# Altium PCB PCB_v01.PcbDoc
Units mm, origin at the board's own origin, x right, y up, seen from the top; angles counter-clockwise.
Board outline 100.71 x 75.2 mm, 2 copper layers (Top Layer, Bottom Layer); 131 components, 78 nets, 366 pads, 171 vias.
Unrouted connection lines stored in the file: 141.
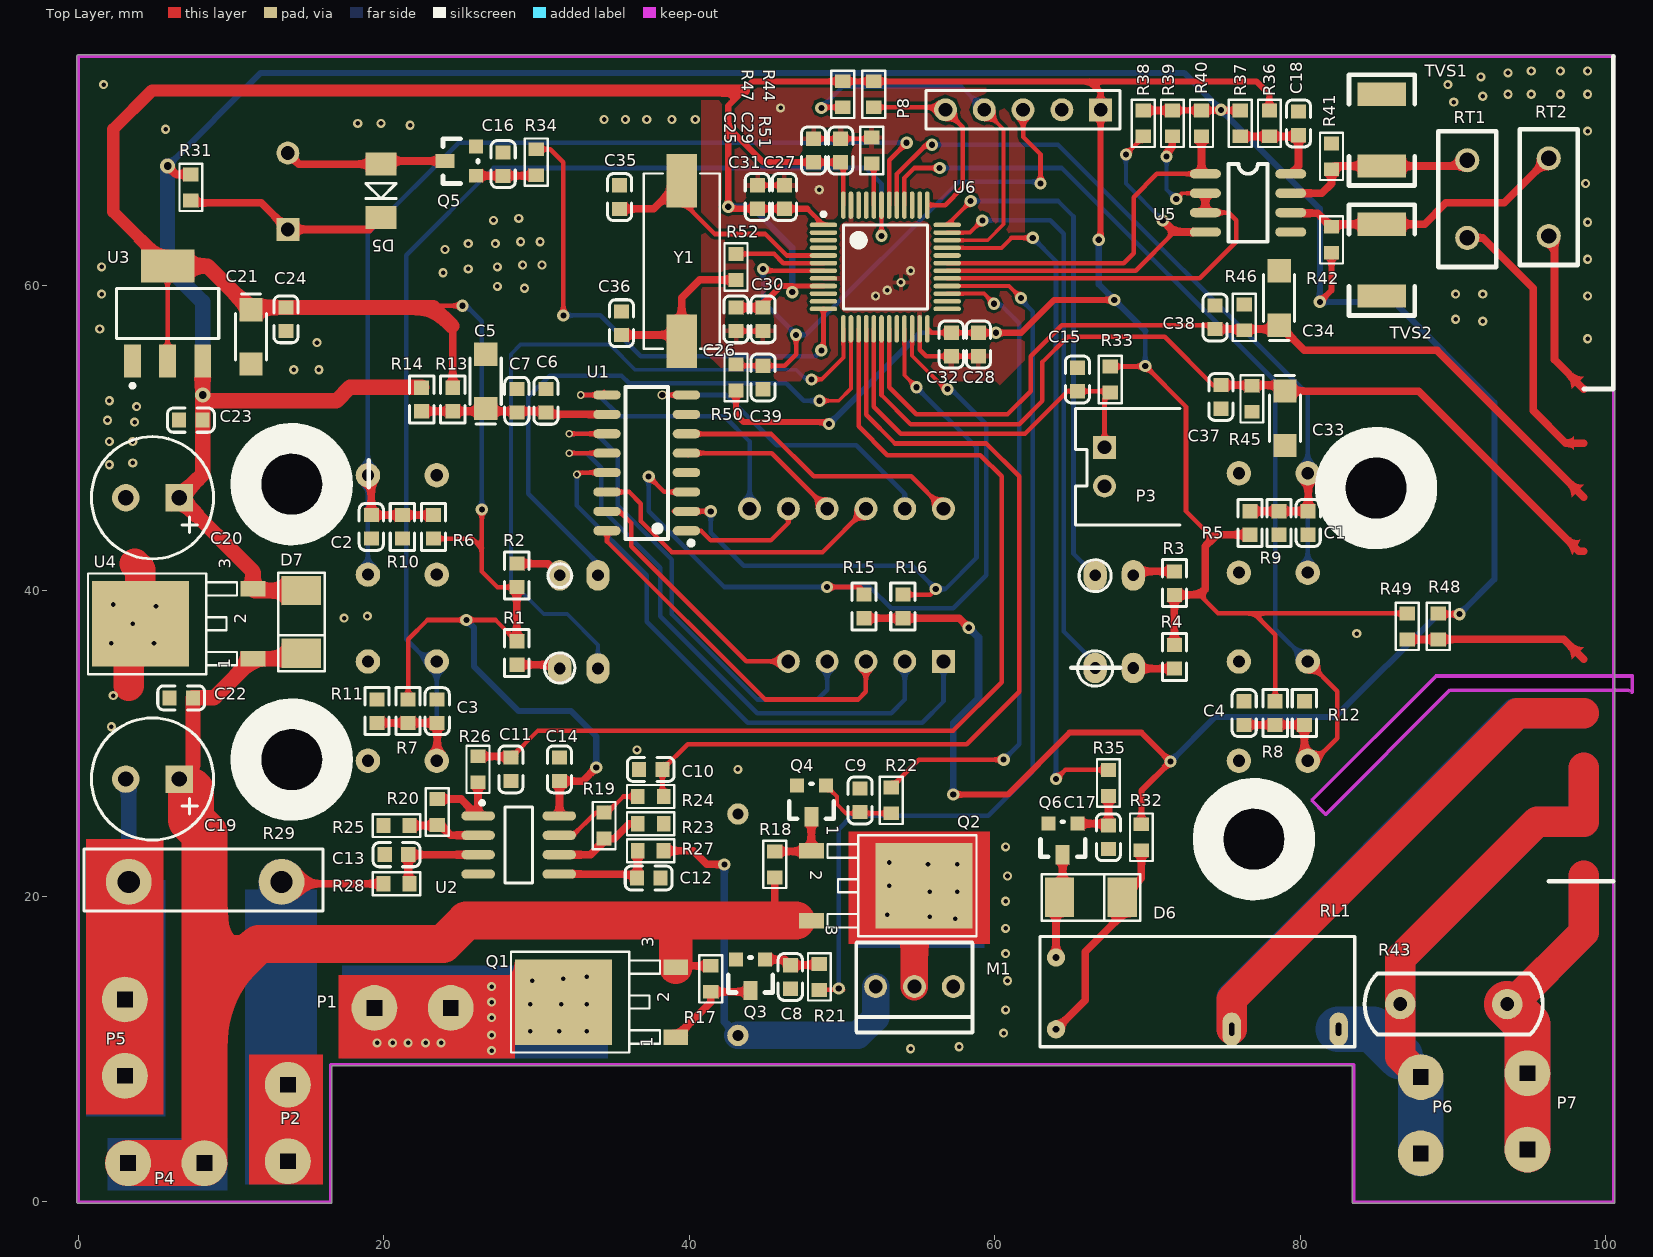
[diagram p0: Top Layer view]
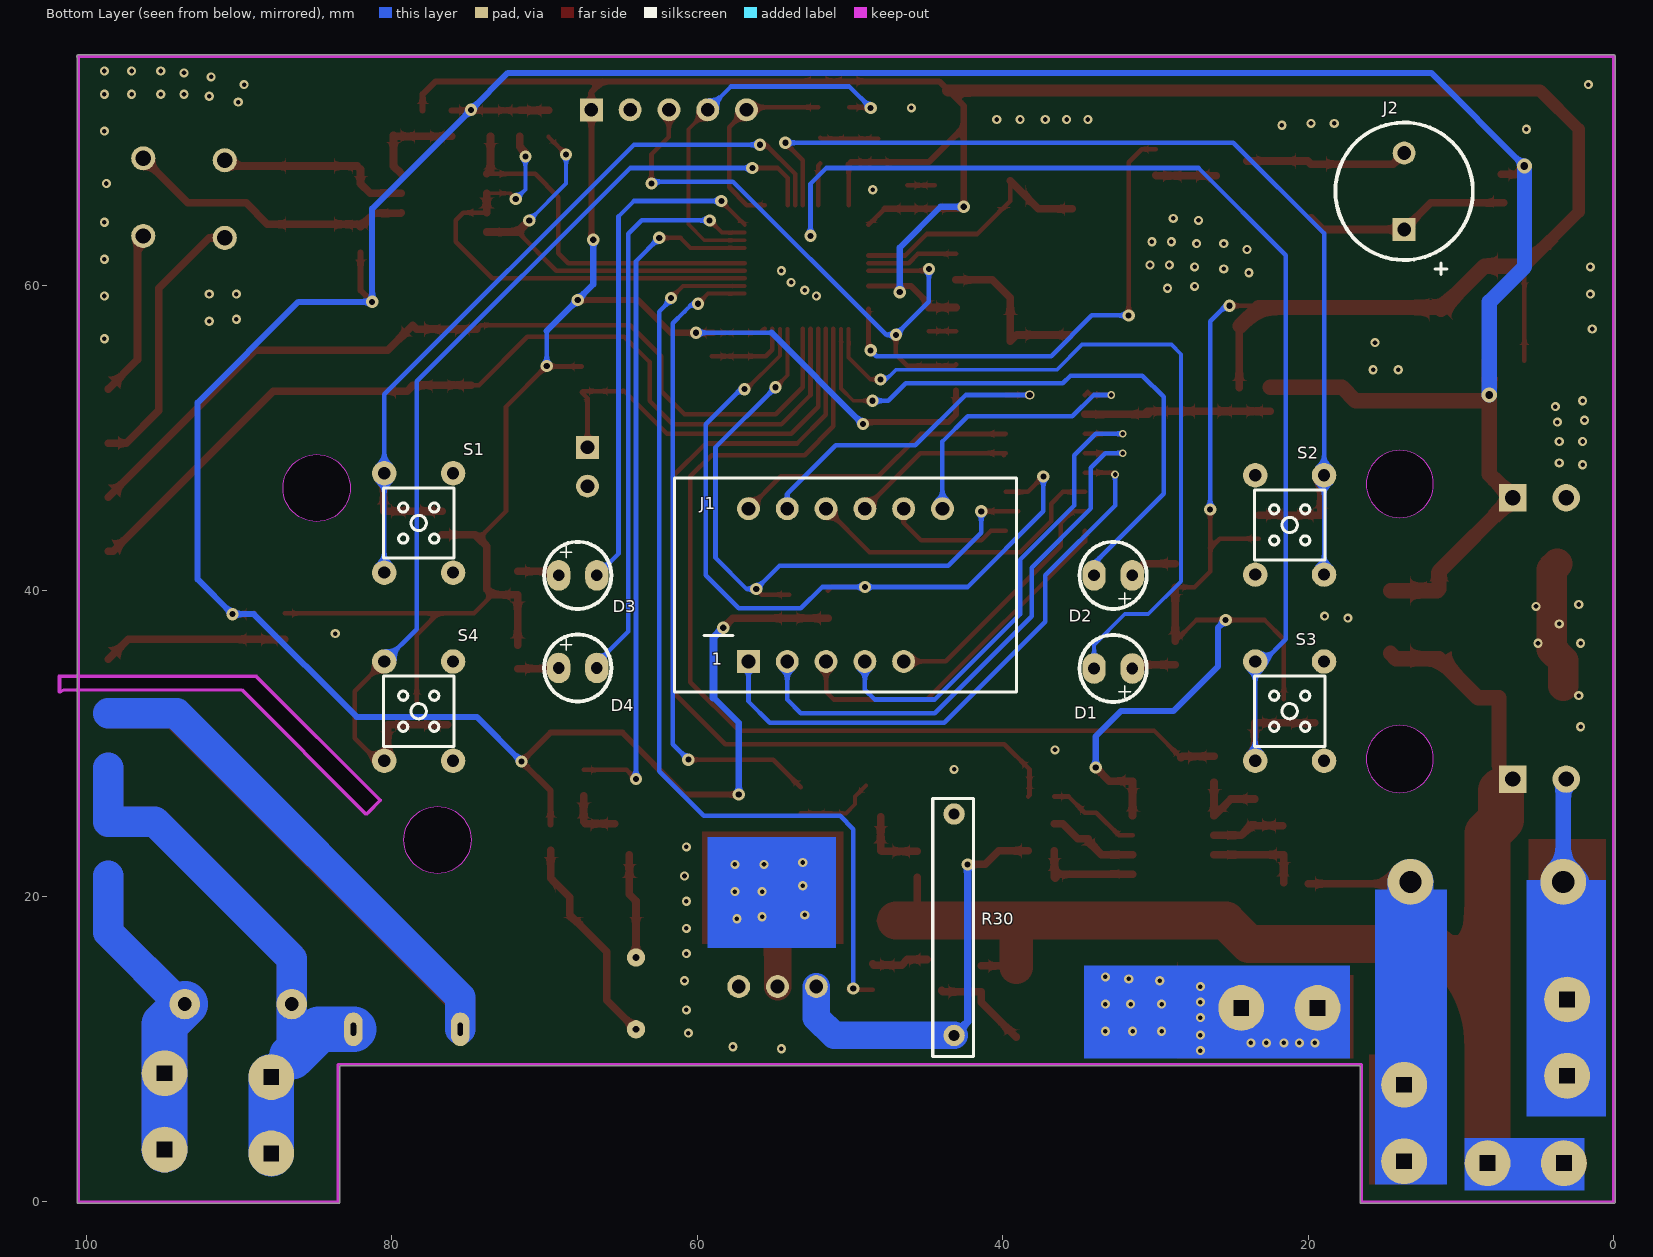
[diagram p1: Bottom Layer view, seen from below]

## Layer stack, top to bottom
Top Solder: solder mask 0.0102, Solder Resist, Dk 3.5
Top Layer: signal copper 0.0356
Dielectric 1: dielectric 0.32, FR-4, Dk 4.8
Bottom Layer: signal copper 0.0356
Bottom Solder: solder mask 0.0102, Solder Resist, Dk 3.5

## Board outline
-0.1,0 ccw(c0,0) 0,-0.1 16.5,-0.1 ccw(c16.5,0) 16.6,0 16.6,8.9 83.4,8.9 83.4,0.061 ccw(c83.5,0.061) 83.404,0.031 ccw(c83.5,0) 83.5,-0.1 100.5,-0.1 ccw(c100.5,0) 100.6,0 100.6,74.949 ccw(c100.514,75) 100.614,75 ccw(c100.514,75) 100.514,75.1 0,75.1 ccw(c0,75) -0.1,75
cut-out: 81.463,25.456 ccw(c81.534,25.527) 81.566,25.432 ccw(c81.661,25.4) 81.732,25.329 89.831,33.428 101.449,33.428 101.682,33.311 ccw(c101.727,33.401) 101.827,33.401 101.827,34.417 ccw(c101.727,34.417) 101.727,34.517 88.9,34.517 ccw(c88.9,34.417) 88.829,34.488 80.701,26.36 ccw(c80.772,26.289) 80.701,26.218
cut-out: 74.8,23.7 ccw(c77,23.7) 77,21.5 ccw(c77,23.7) 79.2,23.7 ccw(c77,23.7) 77,25.9 ccw(c77,23.7)
cut-out: 82.713,46.735 ccw(c84.913,46.735) 84.913,44.535 ccw(c84.913,46.735) 87.113,46.735 ccw(c84.913,46.735) 84.913,48.935 ccw(c84.913,46.735)
cut-out: 14,26.8 cw(c14,29) 11.8,29 cw(c14,29) 14,31.2 cw(c14,29) 16.2,29 cw(c14,29)
cut-out: 14,44.8 cw(c14,47) 11.8,47 cw(c14,47) 14,49.2 cw(c14,47) 16.2,47 cw(c14,47)

## Design rules (kind name [scope] priority, off if disabled: settings)
Clearance [All] p1: gap=0.2
PolygonConnect PolygonConnect_1 [IsVia] p1: connectstyle=Direct reliefconductorwidth=0.3 reliefentries=4 polygonreliefangle="90 Angle" airgapwidth=0.254
PolygonConnect [All] p2: connectstyle=Relief reliefconductorwidth=0.3 reliefentries=4 polygonreliefangle="90 Angle" airgapwidth=0.254
RoutingVias [All] p1: holewidth=0.4 width=0.9 viastyle="Through Hole" minholewidth=0.305 minwidth=0.305 maxholewidth=0.711 maxwidth=1.27
SolderMaskExpansion [All] p1: expansion=0.102
UnRoutedNet UnRoutedNet_1 [All] p1:
UnRoutedNet [All] p2:
Width [All] p1: maxlimit=5 minlimit=0.2 preferedwidth=0.254
29 further rules are at their usual default settings.

## Classes and differential pairs
component class CPU: C18 C19 C20 C21 C22 C23 C24 C25 C26 C27 C28 C29 C30 C31 C32 C33 C34 C35 C36 C37 C38 C39 D7 P4 P5 P6 P7 P8 R36 R37 R38 R39 R40 R41 R42 R43 R44 R45 R46 R47 R48 R49 R50 R51 R52 RT1 RT2 TVS1 TVS2 U3 U4 U5 U6 Y1
component class HMI: C1 C2 C3 C4 C5 C6 C7 D1 D2 D3 D4 J1 R1 R2 R3 R4 R5 R6 R7 R8 R9 R10 R11 R12 R13 R14 R15 R16 S1 S2 S3 S4 U1
component class Main: C8 C9 C10 C11 C12 C13 C14 C15 C16 C17 D5 D6 J2 M1 P1 P2 P3 Q1 Q2 Q3 Q4 Q5 Q6 R17 R18 R19 R20 R21 R22 R23 R24 R25 R26 R27 R28 R29 R30 R31 R32 R33 R34 R35 RL1 U2

## Components (designator, comment, footprint, x,y, rotation, side; value= is the part's Value field where it differs from the comment)
C1 "100nF (104) 10% 50V" 0603_C 80.518,44.45 r90 top
C2 "100nF (104) 10% 50V" 0603_C 19.177,44.196 r90 top
C3 "100nF (104) 10% 50V" 0603_C 23.495,32.131 r270 top
C4 "100nF (104) 10% 50V" 0603_C 76.327,32.004 r270 top
C5 "Cap Pol" CAP-1206 26.67,53.721 r90 top
C6 "1uF (105) 10% 50V" 0603_C 30.607,52.451 r270 top
C7 "100nF (104) 10% 50V" 0603_C 28.702,52.451 r270 top
C8 "100nF (104) 10% 50V" 0603_C 46.609,14.732 r90 top
C9 "100nF (104) 10% 50V" 0603_C 51.181,26.289 r270 top
C10 "100nF (104) 10% 50V" 0603_C 37.473,28.321 r0 top
C11 "100nF (104) 10% 50V" 0603_C 28.321,28.321 r90 top
C12 "100nF (104) 10% 50V" 0603_C 37.338,21.209 r180 top
C13 "100nF (104) 10% 50V" 0603_C 20.828,22.733 r0 top
C14 "100nF (104) 10% 50V" 0603_C 31.496,28.321 r270 top
C15 "100nF (104) 10% 50V" 0603_C 65.405,53.848 r270 top
C16 "100nF (104) 10% 50V" 0603_C 27.813,67.945 r270 top
C17 "100nF (104) 10% 50V" 0603_C 67.437,23.876 r90 top
C18 "100nF (104) 10% 50V" 0603_C 79.883,70.612 r90 top
C19 "Cap Pol" C-RB-8 6.604,27.686 r180 top
C20 "Cap Pol" C-RB-8 6.604,46.101 r180 top
C21 "Cap Pol" CAP-1206 11.303,56.642 r270 top
C22 "100nF (104) 10% 50V" 0603_C 6.731,33 r0 top
C23 "100nF (104) 10% 50V" 0603_C 7.366,51.181 r0 top
C24 "100nF (104) 10% 50V" 0603_C 13.589,57.785 r90 top
C25 "1uF (105) 10% 50V" 0603_C 48.133,68.842 r270 top
C26 "1uF (105) 10% 50V" 0603_C 43.053,57.785 r90 top
C27 "1uF (105) 10% 50V" 0603_C 46.228,65.794 r270 top
C28 "1uF (105) 10% 50V" 0603_C 58.928,56.134 r90 top
C29 "100nF (104) 10% 50V" 0603_C 49.911,68.842 r270 top
C30 "100nF (104) 10% 50V" 0603_C 44.831,57.785 r90 top
C31 "100nF (104) 10% 50V" 0603_C 44.45,65.794 r270 top
C32 "100nF (104) 10% 50V" 0603_C 57.15,56.134 r90 top
C33 "Cap Pol" CAP-1206 78.994,51.308 r270 top
C34 "Cap Pol" CAP-1206 78.613,59.182 r90 top
C35 "22pF (220) 5% 50V" 0603_C 35.433,65.786 r90 top
C36 "22pF (220) 5% 50V" 0603_C 35.56,57.531 r90 top
C37 "100nF (104) 10% 50V" 0603_C 74.803,52.705 r90 top
C38 "100nF (104) 10% 50V" 0603_C 74.422,57.912 r270 top
C39 "100nF (104) 10% 50V" 0603_C 44.831,53.975 r90 top
D1 "LED" LED(С) 32.766,34.925 r0 bottom locked
D2 "LED" LED(С) 32.766,41.021 r0 bottom locked
D3 "LED" LED(С) 67.818,41.021 r180 bottom locked
D4 "LED" LED(С) 67.818,34.96 r180 bottom locked
D5 "Diode" DIODE-1206 19.812,67.945 r270 top
D6 "M7" DO214AC-SMA 66.294,19.939 r0 top
D7 "M7" DO214AC-SMA 14.605,37.973 r270 top
J1 "DPY-3CK" DYP-3BIT_2.8 50.292,40.386 r180 bottom locked
J2 "BEEP" BEEP0905 13.716,66.167 r90 bottom
M1 "风机" CONNECTOR3X2.5 54.737,14.097 r270 top
P1 "Cold+" CONSLICE0.5 24.384,12.7 r180 top
P2 "Cold-" CONSLICE0.5 13.716,2.667 r90 top
P3 "NTC" HDR1X2_2 67.183,48.133 r270 top
P4 "+12V" CONSLICE0.5 8.255,2.54 r180 top
P5 "" CONSLICE0.5 3.048,8.255 r90 top
P6 "L" CONSLICE0.5 87.884,3.175 r90 top
P7 "N" CONSLICE0.5 94.869,3.429 r90 top
P8 "Header 5" HDR1X5 66.929,71.501 r180 top
Q1 "IRFR5305" DPAK 35.433,13.081 r90 top
Q2 "IRFR5305" DPAK 51.689,20.701 r270 top
Q3 "SS8050" SOT-23 44.958,15.875 r180 top
Q4 "SS8050" SOT-23 48.952,27.254 r180 top
Q5 "SS8050" SOT-23 26.035,67.183 r90 top
Q6 "SS8050" SOT-23 65.405,24.765 r180 top
R1 "2k" 0603_R 28.702,35.941 r270 top
R2 "2k" 0603_R 28.702,41.021 r90 top
R3 "2k" 0603_R 71.755,40.513 r90 top
R4 "2k" 0603_R 71.755,35.687 r270 top
R5 "10K" 0603_R 76.708,44.45 r270 top
R6 "10K" 0603_R 23.241,44.196 r270 top
R7 "10K" 0603_R 21.59,32.131 r90 top
R8 "10K" 0603_R 78.359,32.004 r90 top
R9 "220R" 0603_R 78.613,44.45 r90 top
R10 "220R" 0603_R 21.209,44.196 r90 top
R11 "220R" 0603_R 19.558,32.131 r270 top
R12 "220R" 0603_R 80.264,32.004 r270 top
R13 "0R" 0603_R 24.511,52.539 r90 top
R14 "0R" 0603_R 22.479,52.539 r90 top
R15 "10K" 0603_R 51.435,38.989 r270 top
R16 "10K" 0603_R 53.975,38.989 r270 top
R17 "4.7K" RESC1608N-R0603 41.402,14.605 r270 top
R18 "4.7K" RESC1608N-R0603 45.593,22.098 r90 top
R19 "30K" RESC1608N-R0603 34.417,24.638 r270 top
R20 "100K" RESC1608N-R0603 23.495,25.527 r270 top
R21 "1K" RESC1608N-R0603 48.514,14.732 r270 top
R22 "1K" RESC1608N-R0603 53.213,26.289 r90 top
R23 "2k" RESC1608N-R0603 37.473,24.765 r0 top
R24 "10K" RESC1608N-R0603 37.473,26.543 r180 top
R25 "2k" RESC1608N-R0603 20.828,24.638 r180 top
R26 "10K" RESC1608N-R0603 26.162,28.321 r270 top
R27 "2k" RESC1608N-R0603 37.465,22.987 r0 top
R28 "2k" RESC1608N-R0603 20.828,20.828 r180 top
R29 "30mR" RSENSE10MM 3.302,20.955 r0 top
R30 "2.2R" R0.4X14.5 43.18,25.4 r270 bottom
R31 "3.3R" RESC1608N-R0603 7.366,66.421 r270 top
R32 "3.3R" RESC1608N-R0603 69.596,23.876 r270 top
R33 "100K" RESC1608N-R0603 67.564,53.848 r270 top
R34 "1K" RESC1608N-R0603 29.972,68.072 r90 top
R35 "1K" RESC1608N-R0603 67.437,27.432 r90 top
R36 "0R" RESC1608N-R0603 77.978,70.612 r90 top
R37 "0R" RESC1608N-R0603 76.073,70.612 r90 top
R38 "4.7K" RESC1608N-R0603 69.723,70.612 r270 top
R39 "4.7K" RESC1608N-R0603 71.628,70.612 r270 top
R40 "4.7K" RESC1608N-R0603 73.533,70.612 r270 top
R41 "10k" RESC1608N-R0603 82.042,68.453 r270 top
R42 "10k" RESC1608N-R0603 82.042,62.992 r270 top
R43 "10D471" 10D471K 90.043,12.954 r180 top
R44 "10k" RESC1608N-R0603 52.07,72.517 r270 top
R45 "100K" RESC1608N-R0603 76.835,52.578 r270 top
R46 "100K" RESC1608N-R0603 76.327,57.912 r90 top
R47 "10k" RESC1608N-R0603 50.038,72.517 r270 top
R48 "0R" RESC1608N-R0603 89.027,37.68 r90 top
R49 "0R" RESC1608N-R0603 86.995,37.68 r90 top
R50 "10k" RESC1608N-R0603 43.053,53.975 r90 top
R51 "100k" RESC1608N-R0603 51.943,68.834 r90 top
R52 "1M" RESC1608N-R0603 43.053,61.214 r270 top
RL1 "TXS2-24V" ALDP112 64.008,11.303 r0 top
RT1 "BK250-080" RAD0.2 90.932,63.119 r90 top
RT2 "BK250-080" RAD0.2 96.266,63.246 r90 top
S1 "SET/ESC" SWITCH_4_6*6 78.232,44.45 r270 bottom locked
S2 "Auto/Man" SWITCH_4_6*6 21.209,44.323 r90 bottom locked
S3 "Up" SWITCH_4_6*6 21.209,32.131 r270 bottom locked
S4 "Down" SWITCH_4_6*6 78.232,32.131 r270 bottom locked
TVS1 "SMBJ6.5CA" 1812 85.344,72.517 r270 top
TVS2 "SMBJ6.5CA" 1812 85.344,64.008 r270 top
U1 "TM1650" SOIC-16_150MIL 37.211,48.387 r90 top
U2 "LM358" NSO8_N 28.829,23.368 r0 top
U3 "SPX1117-M3-3.3" SOT223 5.842,58.166 r0 top
U4 "LM78M05" DPAK 7.747,37.846 r90 top
U5 "SN65HVD3082" SO-8 73.787,67.31 r0 top
U6 "STM32F030C8T6" STM-LQFP48_N 52.832,61.214 r0 top
Y1 "8MHz" XTAL-HC49S 39.497,61.595 r270 top

## Footprints (in the part's own frame and the unit in brackets; to place one, negate y for a bottom-side part, rotate by r counter-clockwise, add the part's x,y. Pads: shape width x height; smd on the part's side, far side on the other; paste and mask are expansions set on the pad)
10D471K [mm]
  round 2 hole 0.9: 1(-3.5,0) 2(3.5,0)
  silkscreen extent -5.83,-2 5.83,2
0603_C [mm]
  rect 0.93x0.98 smd: 1(-0.77,0) 2(0.77,0)
  silkscreen extent -1.53,-0.79 1.54,0.79, body extent -0.8,-0.4 0.8,0.4, height 0.3
0603_R [mm]
  rect 0.93x0.98 smd: 1(-0.77,0) 2(0.77,0)
  silkscreen extent -1.53,-0.79 1.54,0.79, body extent -0.85,-0.4 0.85,0.4, height 0.56
1812 [mil]
  rect 60x125 smd: 1(0,0) 2(185,0)
  silkscreen extent -50,-85 235,85
ALDP112 [mm]
  round 1.2 hole 0.45: 1(0,0) 2(0,4.7)
  rrect100% 1.2x2.2 hole 0.35 slot 0.85 at 90 deg: 3(11.5,0) 4(18.5,0)
  silkscreen extent -1.05,-1.14 19.56,6.08
BEEP0905 [mm] "蜂鸣器"
  rect 1.5x1.5 hole 0.9: 1(-2.5,0)
  round 1.5 hole 0.9: 2(2.5,0)
  silkscreen extent -5.46,-4.5 4.5,4.5
C-RB-8 [mm] "35V 220UF电容"
  rect 1.8x1.8 hole 1: 1(0,0)
  round 1.8 hole 1: 2(3.5,0)
  silkscreen extent -2.25,-4 5.75,4
CAP-1206 [mil] "贴片元件"
  rect 60x60 smd: 1(-70,0) 2(70,0)
  silkscreen extent -110,-40 60,40, body extent -65,-35 65,35, height 39
CONNECTOR3X2.5 [mm]
  round 1.5 hole 0.9: 1(0,-2.54) 2(0,0) 3(0,2.54)
  silkscreen extent -2.88,-3.81 3.01,3.81
CONSLICE0.5 [mm]
  round 3 hole 1 square: 1(0,0) 2(5,0)
DIODE-1206 [mm] "玻璃封装二极管"
  rect 1.5x2 smd: 1(0,0) 2(3.5,0)
  silkscreen extent 1.25,-1 2.25,1
DO214AC-SMA [mil]
  rect 75x102 smd: 1(-80.7,0) 2(80.7,0)
  silkscreen extent -127,-60 127,60, body extent -104,-55 104,55, height 98
DPAK [mil]
  rect 40x64 smd: 1(-90,-145) 3(90,-145)
  rect 220x250 smd: 2(0,145)
  silkscreen extent -130,-104 130,280, body extent -130,-151 130,247, height 95
DYP-3BIT_2.8 [mm] "数码管"
  rect 1.5x1.5 hole 0.9: 1(-6.35,-5)
  round 1.5 hole 0.9: 2(-3.81,-5) 3(-1.27,-5) 4(1.27,-5) 5(3.81,-5) 7(6.35,5) 8(3.81,5) 9(1.27,5) 10(-1.27,5) 11(-3.81,5) 12(-6.35,5)
  silkscreen extent -11.2,-7 11.2,7
HDR1X2_2 [mm] "Connector; Header; 2 Position"
  rect 1.5x1.5 hole 0.9: 1(-1.27,0)
  round 1.5 hole 0.9: 2(1.27,0)
  silkscreen extent -3.81,-1.91 3.81,4.95
HDR1X5 [mm] "Connector; Header; 5 Position"
  rect 1.5x1.5 hole 0.9: 1(0,0)
  round 1.5 hole 0.9: 2(2.54,0) 3(5.08,0) 4(7.62,0) 5(10.16,0)
  silkscreen extent -1.27,-1.27 11.43,1.27
LED(С) [mm]
  oval 1.524x2 hole 0.762: 1(-1.25,0) 2(1.25,0)
  silkscreen extent -2.2,-2.2 2.2,2.2
NSO8_N [mm] "SOIC-max660"
  oval 2.2x0.6 smd: 1(-2.654,1.905) 2(-2.654,0.635) 3(-2.654,-0.635) 4(-2.654,-1.905) 5(2.654,-1.905) 6(2.654,-0.635) 7(2.654,0.635) 8(2.654,1.905)
  silkscreen extent -2.52,-2.5 0.9,2.88, body extent -1.95,-2.45 1.95,2.45, height 1.75
R0.4X14.5 [mm]
  round 1.4 hole 0.7: 1(0,0) 2(14.5,0)
  silkscreen extent -1.02,-1.4 15.88,1.27
RAD0.2 [mil]
  round 62 hole 39.37: 1(0,0) 2(200,0)
  silkscreen extent -75,-75 275,75
RESC1608N-R0603 [mm]
  rect 0.9x1 smd mask+0.102: 1(-0.85,0) 2(0.85,0)
  silkscreen extent -1.55,-0.75 1.55,0.75, body extent -0.85,-0.48 0.85,0.48, height 0.6
RSENSE10MM [mm]
  round 3 hole 1.45: 1(0,0) 2(10,0)
  silkscreen extent -2.92,-1.91 12.7,2.16
SO-8 [mil]
  oval 80x24 smd: 1(0,0) 2(0,-50) 3(0,-100) 4(0,-150) 5(220,-150) 6(220,-100) 7(220,-50) 8(220,0)
  silkscreen extent 60,-175 160,25
SOIC-16_150MIL [mm]
  oval 0.6x1.8 smd: 1(-4.445,-2.6) 2(-3.175,-2.6) 3(-1.905,-2.6) 4(-0.635,-2.6) 5(0.635,-2.6) 6(1.905,-2.6) 7(3.175,-2.6) 8(4.445,-2.6) 9(4.445,2.6) 10(3.175,2.6) 11(1.905,2.6) 12(0.635,2.6) 13(-0.635,2.6) 14(-1.905,2.6) 15(-3.175,2.6) 16(-4.445,2.6)
  silkscreen extent -5.4,-3.05 4.97,1.4
SOT223 [mm]
  rect 1.1x2.15 smd: 1(-2.3,-3.1) 2(0,-3.1) 3(2.3,-3.1)
  rect 3.5x2.15 smd: 2(0,3.1)
  silkscreen extent -3.35,-4.85 3.35,1.63
SOT-23 [mil]
  rect 36x36 smd: 1(0,0) 2(75,0)
  rect 36x50 smd: 3(38,80)
  silkscreen extent -20,-5 95,85
STM-LQFP48_N [mm] "QFP, 48-Leads, Body 7x7mm, Pitch 0.5mm, IPC Medium Density"
  oval 1.8x0.3 smd: 1(-4.05,2.75) 2(-4.05,2.25) 3(-4.05,1.75) 4(-4.05,1.25) 5(-4.05,0.75) 6(-4.05,0.25) 7(-4.05,-0.25) 8(-4.05,-0.75) 9(-4.05,-1.25) 10(-4.05,-1.75) 11(-4.05,-2.25) 12(-4.05,-2.75) 25(4.05,-2.75) 26(4.05,-2.25) 27(4.05,-1.75) 28(4.05,-1.25) 29(4.05,-0.75) 30(4.05,-0.25) 31(4.05,0.25) 32(4.05,0.75) 33(4.05,1.25) 34(4.05,1.75) 35(4.05,2.25) 36(4.05,2.75)
  oval 0.3x1.8 smd: 13(-2.75,-4.05) 14(-2.25,-4.05) 15(-1.75,-4.05) 16(-1.25,-4.05) 17(-0.75,-4.05) 18(-0.25,-4.05) 19(0.25,-4.05) 20(0.75,-4.05) 21(1.25,-4.05) 22(1.75,-4.05) 23(2.25,-4.05) 24(2.75,-4.05) 37(2.75,4.05) 38(2.25,4.05) 39(1.75,4.05) 40(1.25,4.05) 41(0.75,4.05) 42(0.25,4.05) 43(-0.25,4.05) 44(-0.75,4.05) 45(-1.25,4.05) 46(-1.75,4.05) 47(-2.25,4.05) 48(-2.75,4.05)
  silkscreen extent -4.17,-2.75 2.75,3.57, body extent -3.5,-3.5 3.5,3.5, height 1.6
SWITCH_4_6*6 [mm]
  round 1.6 hole 0.8: 1(-3.25,2.25) 1(3.25,2.25) 2(-3.25,-2.25) 2(3.25,-2.25)
  silkscreen extent -2.3,-2.3 2.3,2.3, body extent -3.99,-3 3.99,3, height 4.9
XTAL-HC49S [mil]
  rect 138x79 smd: 1(-207,0) 2(207,0)
  silkscreen extent -226,-98 226,98, body extent -254,-98 254,98, height 158

## Part data
C1 C2 C3 C4 C7 C8 C9 C10 C11 C12 C13 C14 C15 C16 C17 C18 C22 C23 C24 C29 C30 C31 C32 C37 C38 C39: library part "0603 100nF (104) 10% 50V", "贴片电容"
C5 C19 C20 C21 C33 C34: "极性电解电容"
C6 C25 C26 C27 C28: library part "0603 1uF (105) 10% 50V", "贴片电容"
C35 C36: library part "0603 22pF (220) 5% 50V", "贴片电容"
D1 D2 D3 D4: library part LED0, "Typical INFRARED GaAs LED"
D5: "二极管"
D6 D7: library part Diode, "二极管"
J1: library part DPY-3CK_1, "共阴3位数码管"
J2: "蜂鸣器"
M1: "MALE CONN. 3 POLES P=7.62mm"
P1 P2 P3 P4 P5 P6 P7: library part "Header 2", "Header, 2-Pin"
P8: "Header, 5-Pin"
Q1 Q2: "P-CH MOSFET LOGIC LEVEL 12A 60V SMD"
Q3 Q4 Q5 Q6: "NPN贴片三极管"
R1 R2 R3 R4 R23 R25 R27 R28: library part RES1, "2k/±10%"
R5 R6 R7 R8 R13 R14 R15 R16 R24 R26 R36 R37 R48 R49: library part RES1, "10K/±10%"
R9 R10 R11 R12: library part RES1, "220R/±10%"
R17 R18 R38 R39 R40: library part RES1, "4.7K/±10%"
R19: library part RES1, "30K/±1%"
R20 R33 R45 R46: library part RES1, "100K/±10%"
R21 R22 R34 R35: library part RES1, "1K/±10%"
R29 R30: library part Res1, "Resistor"
R31 R32: library part RES1, "3.3R/±10%"
R41 R42 R44 R47 R50: library part RES1, "10k/±10%"
R43: library part "Res Varistor", "Varistor (Voltage-Sensitive Resistor)"
R51: library part RES1, "100k±10%"
R52: library part RES1, "1M/±10%"
RL1: "MONOSTABLE RELAY 2POLES 110V 1A COIL24V"
RT1 RT2: library part PTC-Thermistor, "热敏电阻"
S1 S2 S3 S4: library part SW-PB, "6*6*5四脚直插轻触开关"
TVS1 TVS2: library part TVS管-贴片, "TVS"
U2: "双运放"
U3: library part "IC-SPX1117M3-L-3.3 工业级 SOT-223 SIPEX", "IC"
U4: library part LDO-78XX_1, "LDO"
U5: library part RS485
U6: "ARM Cortex-M0 32-bit MCU, 64 KB Flash, 8 KB Internal RAM, 39 I/Os, 48-pin LQFP, -40 to 85 degC, Tray"
Y1: library part RU5608001, "QUARTZ 8MHz SMD"

## Via types
v1: diameter 0.6, hole 0.3, Top Layer to Bottom Layer, 116 vias
v2: diameter 0.8, hole 0.4, Top Layer to Bottom Layer, 48 vias
v3: diameter 0.508, hole 0.305, Top Layer to Bottom Layer, 4 vias
v4: diameter 1, hole 0.5, Top Layer to Bottom Layer, 2 vias
v5: diameter 0.6, hole 0.4, Top Layer to Bottom Layer, 1 vias

## Nets (pads, with @x,y where several pads share a name; then routed paths per layer and width w, separated by ;. In a path a pad name is that pad's centre, name@x,y a point inside that pad or via, vN(x,y) a via of type N, cw(c..) or ccw(c..) an arc to the next point about the centre after c; other vN are vias at no path point)
3.3V: C14.2 C21.1 C24.2 C25.2 C26.2 C27.2 C28.2 C29.2 C30.2 C31.2 C32.2 P8.1 R1.1 R2.1 R3.1 R4.1 R5.2 R6.2 R7.2 R8.2 R13.2 R33.1 R36.2 R44.1 R47.1 R49.2 R50.1 U2.8 U3.2 U6.1 U6.9 U6.24 U6.48 | length 324.8
  Top Layer w0.3: U3.2@5.842,55.066 U3.2@5.842,61.266 ; R7.2 21.59,36.83 22.86,38.1 v2(25.4,38.1) 27.313,38.1 R1.1 ; 23.233,58.555 23.352,58.674 v2(25.146,58.674) ; R6.2 25.789,43.426 26.416,42.799 ; v2(26.416,45.339) 26.416,42.799 ; R2.1 27.44,40.251 26.416,41.275 26.416,42.799 ; C30.2 C30.2@44.831,58.801 ; 46.736,59.964 U6.9 ; 47.722,65.024 U6.1 ; U6.48 C29.2@50.082,67.901 ; U6.24 55.842,56.904 C32.2 C28.2 ; R33.1 69.811,54.698 v2(69.85,54.737) 72.517,52.07 72.517,45.212 74.295,43.434 ; 73.398,39.743 74.611,38.53 76.962,38.53 ; R8.2 78.359,37.133 76.962,38.53 ; R49.2 76.962,38.53
  Top Layer w0.4: R50.1 43.053,51.562 43.561,51.054 49.022,51.054 v2(49.149,50.927) ; C30.2@44.831,58.801 45.994,59.964 46.736,59.964 v2(46.736,59.563) ; 47.722,65.024 C27.2 C31.2 42.672,65.024 v2(42.545,65.151) 42.545,70.358 ; C29.2@50.082,67.901 C29.2 C25.2 44.831,68.072 42.545,70.358 ; C28.2 v2(60.079,56.904) 61.73,56.904 63.881,59.055 v2(67.818,59.055) ; v2(66.802,62.992) 66.929,63.119 P8.1 66.929,72.644 66.206,73.367 ; R36.2 77.978,72.517 77.128,73.367 66.206,73.367 ; 42.545,70.358 42.545,71.755 43.561,72.771 44.157,73.367 R47.1 R44.1 66.206,73.367
  Top Layer w0.5: 24.447,57.34 24.511,57.277 R13.2 ; R1.1 R2.1 ; U2.8 31.496,25.286 C14.2 33.012,27.551 v2(33.909,28.448) ; C26.2 C30.2 ; R4.1 R3.1 73.398,39.743 73.787,40.132 73.787,42.926 74.295,43.434 74.541,43.68 R5.2
  Top Layer w0.8: U3.2@5.842,61.266 2.286,64.822 2.286,70.231 4.826,72.771 43.561,72.771
  Top Layer w1: U3.2@5.842,61.266 8.457,61.266 C21.1 11.438,58.555 C24.2 23.233,58.555 24.447,57.34
  Bottom Layer w0.3: v2(25.146,58.674) 25.4,58.674 26.416,57.658 v2(26.416,45.339) ; 55.126,56.904 v2(60.079,56.904) ; v2(69.85,54.737) 69.85,57.023
  Bottom Layer w0.4: v2(25.4,38.1) 25.908,37.592 25.908,35.052 28.829,32.131 32.258,32.131 33.909,30.48 v2(33.909,28.448) ; v2(42.545,65.151) 44.069,65.151 46.736,62.484 v2(46.736,59.563) ; v2(49.149,50.927) 55.126,56.904 ; v2(66.802,62.992) 66.802,60.071 v2(67.818,59.055) 69.85,57.023
5V: C20.1 C23.2 D7.1 R14.2 R15.2 R16.2 R31.1 R32.1 R37.2 R38.1 R39.1 R40.1 R42.2 R48.2 U3.3 U4.3 | length 244.7
  Top Layer w0.4: v2(57.277,26.67) 60.833,26.67 64.897,30.734 69.596,30.734 v2(71.501,28.829) 69.596,26.924 R32.1 ; R39.1 R40.1 R37.2 ; v2(81.28,58.928) 82.042,59.69 R42.2 ; R48.2 89.076,38.481 v2(90.424,38.481)
  Top Layer w0.5: v4(5.842,67.818) 6.389,67.271 R31.1 ; R15.2 R16.2 57.666,38.219 v2(58.293,37.592) ; R38.1 R39.1
  Top Layer w1: U3.3 8.136,55.06 v4(8.136,52.832) v4@8.136,52.451 ; D7.1 11.539,40.023 U4.3 11.43,41.275 C20.1 8.136,47.633 C23.2 v4@8.136,52.451 ; R14.2@22.479,53.34 17.78,53.34 16.891,52.451 v4@8.136,52.451
  Bottom Layer w0.4: v4(5.842,67.818) 11.938,73.914 72.39,73.914 v2(74.803,71.501) 81.28,65.024 v2(81.28,58.928) 86.106,58.928 92.71,52.324 92.71,40.767 v2(90.424,38.481) 89.027,38.481 82.296,31.75 74.422,31.75 v2(71.501,28.829) ; v2(57.277,26.67) 57.277,31.369 58.928,33.02
  Bottom Layer w0.5: v2(58.293,37.592) 58.928,36.957 58.928,33.02
  Bottom Layer w1: v4(5.842,67.818) 5.842,61.222 8.136,58.928 v4(8.136,52.832)
12V: C19.1 C22.2 D7.2 P4.1 P4.2 Q1.3 Q2.3 R17.1 R18.1 U4.1 | length 93.1
  Top Layer w0.5: Q1.3 39.204,15.455 R17.1 ; R18.1 45.593,19.05 46.228,18.415 ; 46.99,18.415 Q2.3
  Top Layer w1: C19.1@7.501,28.583 C22.2 8.87,33 U4.1 14.242,35.56 D7.2
  Top Layer w2.2: Q1.3 39.116,17.653 39.878,18.415
  Top Layer w2.5: 8.255,13.335 11.811,16.891 23.876,16.891 25.4,18.415 39.878,18.415 46.228,18.415 46.99,18.415
  Top Layer w3: P4.2 P4.1 8.255,13.335 8.255,24.13 7.366,25.019 C19.1@7.366,26.924
485A: RT2.1 | length 11
  Top Layer w0.5: RT2.1 96.647,62.865 96.647,55.133 98.56,53.22
485B: RT1.1 | length 17.9
  Top Layer w0.5: RT1.1 91.948,63.119 95.25,59.817 95.25,51.816 97.386,49.68 98.56,49.68
DE: R39.2 U5.2 U5.3 U6.29 | length 31.4
  Top Layer w0.254: v2(71.882,65.659) 72.263,66.04 U5.2
  Top Layer w0.3: U6.29 73.418,60.464 75.819,62.865 75.819,64.262 75.311,64.77 U5.3
  Top Layer w0.5: v2(71.247,68.453) 71.247,68.707 71.628,69.088 R39.2 ; U5.3 U5.2
  Bottom Layer w0.254: v2(71.247,68.453) 71.247,66.294 v2(71.882,65.659)
GND: C1.1 C2.1 C3.1 C4.1 C5.2 C6.1 C7.1 C8.1 C9.1 C10.1 C11.1 C12.1 C13.1 C14.1 C15.1 C16.1 C17.1 C18.2 C19.2 C20.2 C21.2 C22.1 C23.1 C24.1 C25.1 C26.1 C27.1 C28.1 C29.1 C30.1 C31.1 C32.1 C33.2 C34.2 C35.2 C36.2 C37.1 C38.1 C39.1 P3.2 P5.1 P5.2 P8.2 Q3.2 Q4.2 Q5.2 Q6.2 R9.1 R10.1 R11.1 R12.1 R23.2 R25.2 R29.1 R30.1 R41.1 R45.2 R46.2 R51.2 S1.1 S2.1 S3.1 S4.1 TVS1.1 TVS2.2 U1.4 U2.4 U3.1 U4.2 U5.5 U6.8 U6.23 U6.47 | length 53.8
  Top Layer w0.3: C26.1 C30.1 ; C31.1 C27.1 ; C25.1 C29.1 51.871,69.612 R51.2 ; U6.23 55.082,55.789 55.507,55.364 C32.1 C28.1@59.055,55.364
  Top Layer w2: 3.302,33.782 3.302,35.433 4.064,36.195 U4.2 4.064,41.402 3.683,41.783
  Top Layer w3: P5.1 P5.2 3.048,20.701 R29.1
  Bottom Layer w1: C19.2 3.302,27.488 R29.1
  Bottom Layer w3: P5.1 P5.2 3.048,20.701 R29.1
  other v1: 54.483,10.033 57.658,10.16 60.579,11.049 60.706,12.573 60.833,14.478 60.706,16.256 60.706,17.907 60.706,19.685 60.833,21.336 60.706,23.241 43.18,28.321 36.576,29.591 2.159,31.115 2.286,33.147 2.159,36.576 4.953,36.576 83.693,37.211 3.556,37.846 17.399,38.227 18.923,38.354 5.08,38.989 2.286,39.116 2.032,48.26 3.556,48.387 2.032,49.784 3.556,49.784 3.683,51.054 1.905,51.181 3.81,52.07 2.032,52.451 14.097,54.483 15.748,54.483 15.621,56.261 98.806,56.515 1.397,57.15 91.948,57.658 90.17,57.785 52.197,59.309 98.806,59.309 1.524,59.436 90.17,59.436 91.948,59.436 52.959,59.69 29.21,59.817 27.432,59.944 53.848,60.198 23.876,60.833 54.483,60.96 25.527,61.087 1.524,61.214 27.432,61.214 29.083,61.341 30.353,61.341 98.806,61.722 24.003,62.357 25.527,62.738 27.305,62.738 28.956,62.865 30.226,62.865 98.806,64.135 27.178,64.262 28.829,64.389 48.506,66.271 98.679,66.675 98.806,70.104 5.715,70.231 21.717,70.485 18.288,70.612 19.812,70.612 34.417,70.866 35.814,70.866 37.211,70.866 38.862,70.866 40.386,70.866 45.974,71.628 90.043,72.009 91.948,72.39 93.599,72.517 95.123,72.517 97.028,72.517 98.806,72.517 1.651,73.152 89.662,73.152 91.821,73.66 93.599,73.914 95.123,74.041 97.028,74.041 98.806,74.041
L: P6.1 P6.2 R43.2 RL1.4 | length 64.9
  Top Layer w2: P6.2 86.543,9.516 R43.2 86.543,15.931 95.512,24.9 98.56,24.9 98.56,28.44
  Bottom Layer w2: P6.2 86.543,9.516 R43.2 86.543,15.931 95.512,24.9 98.56,24.9 98.56,28.44
  Bottom Layer w3: RL1.4 84.756,11.303 86.543,9.516 ; P6.1 P6.2
N: P7.1 P7.2 R43.1 | length 41.5
  Top Layer w2: R43.1 93.853,12.954 98.56,17.661 98.56,21.36
  Top Layer w3: R43.1 94.869,11.628 P7.2 P7.1
  Bottom Layer w2: R43.1 93.853,12.954 98.56,17.661 98.56,21.36
  Bottom Layer w3: R43.1 94.869,11.628 P7.2 P7.1
NetC1_2: C1.2 R5.1 R9.2 S1.2 U6.41 | length 54.5
  Top Layer w0.3: U6.41 53.582,67.298 55.499,69.215 v2(55.88,69.215)
  Top Layer w0.5: R5.1 C1.2 80.518,47.664 S1.2@80.482,47.7
  Bottom Layer w0.3: v2(55.88,69.215) 64.135,69.215 80.482,52.868 80.482,47.7 S1.2@80.482,41.2
NetC2_2: C2.2 R6.1 R10.2 S2.2 U6.42 | length 71.4
  Top Layer w0.3: U6.42 53.082,68.195 v2(54.229,69.342)
  Top Layer w0.5: S2.2@18.959,47.573 19.177,47.355 C2.2 R6.1
  Bottom Layer w0.3: S2.2@18.959,41.073 18.959,47.573 18.959,63.409 24.892,69.342 v2(54.229,69.342)
NetC3_2: C3.2 R7.1 R11.2 S3.2 U6.43 | length 80
  Top Layer w0.254: v2(52.582,63.25) U6.43
  Top Layer w0.5: R11.2 R7.1 C3.2 23.495,28.917 S3.2@23.459,28.881
  Bottom Layer w0.3: S3.2@23.459,28.881 23.459,35.381 22.912,35.381 21.463,36.83 21.463,61.976 27.178,67.691 51.562,67.691 52.582,66.671 v2(52.582,63.25)
NetC4_2: C4.2 R8.1 R12.2 S4.2 U6.40 | length 66.1
  Top Layer w0.3: U6.40 54.082,67.036 54.737,67.691 v2(56.388,67.691) ; S4.2@80.482,28.881 80.951,28.881 82.423,30.353 82.423,33.44 S4.2@80.482,35.381
  Top Layer w0.5: C4.2 R12.2 80.264,29.099 S4.2@80.482,28.881
  Bottom Layer w0.3: v2(56.388,67.691) 64.389,67.691 78.359,53.721 78.359,37.504 S4.2@80.482,35.381
NetC5_1: C5.1 C6.2 C7.2 R13.1 R14.1 U1.10 | length 12.4
  Top Layer w0.5: R14.1 R13.1 30.519,51.769 C6.2 ; C6.2@30.416,51.625 30.48,51.562 U1.10
NetC8_2: C8.2 Q3.1 R21.1 | length 3.7
  Top Layer w0.5: Q3.1 46.236,15.875 C8.2 48.434,15.502 R21.1
NetC9_2: C9.2 Q4.1 R22.1 | length 5.3
  Top Layer w0.254: Q4.1 49.657,26.549 49.657,26.035 50.253,25.439 C9.2@51.181,25.439
  Top Layer w0.3: C9.2@51.181,25.439 R22.1
NetC10_2: C10.2 R24.1 U6.16 | length 58.7
  Top Layer w0.3: R24.1 38.243,26.623 C10.2 39.894,29.972 58.166,29.972 61.595,33.401 61.595,47.498 59.436,49.657 53.467,49.657 51.582,51.542 U6.16
NetC11_2: C11.2 R26.1 U6.15 | length 67
  Top Layer w0.3: C11.2 30.091,30.861 57.277,30.861 60.452,34.036 60.452,47.498 59.055,48.895 52.959,48.895 51.082,50.772 U6.15
  Top Layer w0.5: R26.1 28.241,29.171 C11.2
NetC12_2: C12.2 R27.1 U2.5 | length 7
  Top Layer w0.5: U2.5 36.314,21.463 C12.2 36.615,21.256 R27.1
NetC13_2: C13.2 R28.1 U2.3 | length 6.4
  Top Layer w0.5: R28.1@21.598,20.908 C13.2 U2.3
NetC15_2: C15.2 P3.1 R33.2 U6.17 | length 26.3
  Top Layer w0.3: U6.17 52.082,52.058 53.848,50.292 61.976,50.292 64.762,53.078 C15.2 67.484,53.078 R33.2 67.183,52.617 P3.1
NetC16_2: C16.2 Q5.1 R34.1 | length 4
  Top Layer w0.5: Q5.1 29.933,67.183 R34.1
NetC17_2: C17.2 Q6.1 R35.1 | length 3.8
  Top Layer w0.5: Q6.1 67.318,24.765 67.437,24.884 R35.1
NetC18_1: C18.1 R36.1 R37.1 U5.8 | length 6.6
  Top Layer w0.5: R37.1 R36.1 79.803,69.762 C18.1 79.883,67.818 U5.8
NetC35_1: C35.1 U6.5 Y1.1 | length 16.9
  Top Layer w0.3: Y1.1 39.497,65.532 41.656,63.373 44.958,63.373 46.367,61.964 U6.5
  Top Layer w0.5: C35.1 37.66,65.016 Y1.1
NetC36_1: C36.1 R52.2 Y1.2 | length 11
  Top Layer w0.5: C36.1 39.073,56.761 Y1.2 39.497,59.182 40.679,60.364 R52.2
NetD1_1: D1.1 R1.2 | length 2.9
  Top Layer w0.5: R1.2 31.27,35.171 D1.1
NetD1_2: D1.2 U6.13 | length 49.3
  Top Layer w0.254: v2(48.006,53.848) 48.641,53.848 50.082,55.289 U6.13
  Bottom Layer w0.254: D1.2 34.016,36.469 32.004,38.481 30.472,38.481 28.321,40.632 28.321,55.499 28.956,56.134 34.798,56.134 36.449,54.483 46.99,54.483 47.625,53.848 v2(48.006,53.848)
NetD2_1: D2.1 R2.2 | length 3.1
  Top Layer w0.5: R2.2 30.746,41.791 D2.1
NetD2_2: D2.2 U6.14 | length 40.2
  Top Layer w0.254: v2(48.514,52.451) 49.784,52.451 50.582,53.249 U6.14
  Bottom Layer w0.3: D2.2 34.016,41.803 29.464,46.355 29.464,52.705 30.861,54.102 35.56,54.102 36.068,53.594 46.355,53.594 47.498,52.451 v2(48.514,52.451)
NetD3_1: D3.1 R3.2 | length 2.8
  Top Layer w0.5: D3.1 69.33,41.283 R3.2
NetD3_2: D3.2 U6.36 | length 33.4
  Top Layer w0.254: U6.36 58.42,65.502 v2(58.42,65.532)
  Bottom Layer w0.3: v2(58.42,65.532) 64.135,65.532 65.151,64.516 65.151,42.438 D3.2
NetD4_1: D4.1 R4.2 | length 2.7
  Top Layer w0.5: D4.1 69.111,34.917 R4.2
NetD4_2: D4.2 U6.35 | length 37.6
  Top Layer w0.254: U6.35 58.384,63.464 v2(59.182,64.262)
  Bottom Layer w0.3: v2(59.182,64.262) 63.627,64.262 64.508,63.381 64.508,37.346 66.568,35.286 D4.2
NetD5_1: D5.1 J2.2 Q5.3 | length 10.7
  Top Layer w0.5: J2.2 14.438,67.945 D5.1 20.015,68.148 Q5.3
NetD5_2: D5.2 J2.1 R31.2 | length 13.7
  Top Layer w0.5: R31.2@7.2,65.405 11.978,65.405 J2.1 19.034,63.667 D5.2
NetD6_1: D6.1 Q6.3 RL1.2 | length 6.9
  Top Layer w0.5: RL1.2 64.008,19.703 D6.1 64.44,20.135 Q6.3
NetD6_2: D6.2 R32.2 RL1.1 | length 14
  Top Layer w0.5: RL1.1 65.913,13.208 65.913,16.383 68.344,18.814 D6.2 69.596,21.191 R32.2
NetJ1_1: J1.1 U1.13 | length 38.9
  Top Layer w0.3: v3(32.639,47.625) 32.766,47.752 U1.13
  Bottom Layer w0.3: v3(32.639,47.625) 32.639,45.593 37.211,41.021 37.211,37.973 43.815,31.369 55.245,31.369 56.642,32.766 J1.1
NetJ1_2: J1.2 U1.12 | length 37.8
  Top Layer w0.3: v3(32.131,49.022) U1.12
  Bottom Layer w0.3: v3(32.131,49.022) 33.274,49.022 34.227,48.069 34.227,45.402 38.1,41.529 38.1,38.354 44.45,32.004 53.213,32.004 54.102,32.893 J1.2
NetJ1_3: J1.3 U1.16 | length 24.1
  Top Layer w0.3: U1.16 34.611,43.24 44.958,32.893 51.054,32.893 51.562,33.401 J1.3
NetJ1_4: J1.4 U1.11 | length 32.7
  Top Layer w0.3: v3(32.131,50.292) U1.11
  Bottom Layer w0.3: v3(32.131,50.292) 33.909,50.292 35.306,48.895 35.306,45.593 38.862,42.037 38.862,38.481 44.45,32.893 48.387,32.893 49.022,33.528 J1.4
NetJ1_5: J1.5 U1.15 | length 16.8
  Top Layer w0.3: U1.15 35.433,45.212 36.195,44.45 36.195,42.926 43.735,35.386 J1.5
NetJ1_7: J1.7 U1.9 | length 18.6
  Top Layer w0.3: v3(32.893,52.832) 34.223,52.832 34.417,53.026 U1.9
  Bottom Layer w0.3: v3(32.893,52.832) 34.036,52.832 35.433,51.435 42.291,51.435 43.942,49.784 J1.7
NetJ1_8: J1.8 U1.1 | length 8.3
  Top Layer w0.3: U1.1 40.767,43.942 41.402,43.307 45.339,43.307 46.482,44.45 J1.8
NetJ1_9: J1.9 U1.5 | length 10.9
  Top Layer w0.3: U1.5@39.938,48.895 U1.5 45.386,49.022 J1.9
NetJ1_10: J1.10 U1.14 | length 20.4
  Top Layer w0.3: U1.14 36.068,46.482 36.83,45.72 36.83,44.577 38.862,42.545 48.721,42.545 J1.10
NetJ1_11: J1.11 U1.8 | length 21.1
  Top Layer w0.3: v5(38.227,52.832) U1.8
  Bottom Layer w0.3: v5(38.227,52.832) 42.418,52.832 45.72,49.53 50.927,49.53 54.102,46.355 J1.11
NetJ1_12: J1.12 U1.6 | length 18.9
  Top Layer w0.3: U1.6 39.827,50.276 45.355,50.276 48.133,47.498 54.53,47.498 J1.12
NetM1_1: M1.1 R27.2 R30.2 | length 27.4
  Top Layer w0.5: R27.2 40.259,22.987 41.148,22.098 v2(42.291,22.098)
  Bottom Layer w0.5: v2(42.291,22.098) 42.291,11.789 R30.2
  Bottom Layer w1.8: R30.2 51.032,10.9 52.197,12.065 M1.1
NetM1_2: M1.2 Q2.2 | length 6.9
  Top Layer w1.8: M1.2 54.737,20.066 Q2.2
  other v1: 57.404,18.542 55.753,18.669 52.959,18.796 55.753,20.32 57.531,20.32 53.086,20.701 55.626,22.098 57.531,22.098 53.086,22.225
NetP1_1: P1.1 P1.2 Q1.2 | length 12
  Top Layer w3: P1.2 P1.1 Q1.2@31.369,12.7
  other v1: 27.051,10.922 29.591,11.176 31.496,11.176 33.274,11.176 27.051,12.065 29.591,12.954 31.623,12.954 33.274,12.954 27.051,13.081 27.051,14.097 29.718,14.478 31.75,14.605 33.274,14.732
NetP2_1: P2.1 P2.2 R28.2 R29.2 | length 30.2
  Top Layer w0.5: R29.2 13.429,20.828 R28.2
  Top Layer w3: P2.1 P2.2
  Bottom Layer w3: R29.2 13.302,8.034 13.716,7.62 P2.1
NetP9_6: R48.1 R49.1 | length 12.1
  Top Layer w0.5: R49.1 R48.1 97.25,36.83 98.56,35.52
NetP9_7: RL1.3 | length 65.6
  Top Layer w2: RL1.3 75.508,13.278 94.21,31.98 98.56,31.98
  Bottom Layer w2: RL1.3 75.508,13.405 94.083,31.98 98.56,31.98
NetQ1_1: Q1.1 Q3.3 R17.2 | length 6.5
  Top Layer w0.5: Q1.1 41.402,13.081 R17.2 43.905,13.755 Q3.3
NetQ2_1: Q2.1 Q4.3 R18.2 | length 4.6
  Top Layer w0.5: R18.2 47.928,22.948 47.987,23.006 Q4.3
NetR15_1: R15.1 U1.3 U6.22 | length 51.9
  Top Layer w0.254: U6.22 54.582,55.4 56.896,53.086 v2(56.896,53.213)
  Top Layer w0.3: v2(37.338,47.498) 38.354,46.482 U1.3 ; v2(49.022,40.259) 51.189,40.259 R15.1@51.435,40.013
  Bottom Layer w0.3: v2(37.338,47.498) 37.338,45.212 42.291,40.259 v2(49.022,40.259) 51.816,40.259 53.213,38.862 57.277,38.862 59.436,41.021 59.436,50.927 57.15,53.213 v2(56.896,53.213)
NetR16_1: R16.1 U1.2 U6.21 | length 42.8
  Top Layer w0.254: U6.21 54.082,54.122 v2(54.864,53.34)
  Top Layer w0.3: U1.2@38.989,45.212 U1.2 v2(41.402,45.212) ; R16.1 55.761,39.759 v2(56.134,40.132)
  Bottom Layer w0.3: v2(41.402,45.212) 41.402,43.815 43.561,41.656 54.61,41.656 v2(56.134,40.132) 56.769,40.132 58.801,42.164 58.801,49.403 v2(54.864,53.34)
NetR19_1: R19.1 R24.2 U2.7 | length 6.2
  Top Layer w0.3: U2.7 32.385,24.003 33.87,25.488 R19.1 34.632,25.488 35.687,26.543 R24.2
NetR19_2: R19.2 R23.1 U2.6 | length 6.1
  Top Layer w0.5: U2.6 33.528,22.733 34.417,23.622 R19.2 35.091,23.788 36.068,24.765 R23.1
NetR20_1: R20.1 R26.2 U2.1 | length 5.3
  Top Layer w0.5: R20.1 25.071,26.377 26.162,25.286 R26.2
NetR20_2: R20.2 R25.1 U2.2 | length 4.8
  Top Layer w0.5: R25.1 23.456,24.638 R20.2 23.71,24.677 24.384,24.003 U2.2
NetR21_2: R21.2 U6.28 | length 63.1
  Top Layer w0.254: U6.28 60.94,59.964 v2(61.722,59.182)
  Top Layer w0.3: R21.2 50.077,13.882 49.989,13.97 v2(49.784,13.97)
  Bottom Layer w0.3: v2(49.784,13.97) 49.784,24.412 50.645,25.273 59.563,25.273 62.484,28.194 62.484,58.293 61.722,59.055 v2(61.722,59.182)
NetR22_2: R22.2 U6.27 | length 42.6
  Top Layer w0.254: U6.27 59.281,59.464 v2(59.944,58.801)
  Top Layer w0.3: R22.2 55.03,28.956 v2(60.579,28.956)
  Bottom Layer w0.254: v2(59.944,58.801) 60.325,58.801 60.833,58.293
  Bottom Layer w0.3: v2(60.579,28.956) 61.595,29.972 61.595,57.531 60.833,58.293
NetR34_2: R34.2 U6.12 | length 33.1
  Top Layer w0.3: R34.2 30.9,68.922 31.75,68.072 v2(31.75,58.039) ; v2(48.641,55.753) 48.782,55.894 U6.12
  Bottom Layer w0.3: v2(31.75,58.039) 34.163,58.039 36.83,55.372 48.26,55.372 v2(48.641,55.753)
NetR35_2: R35.2 U6.33 | length 45.6
  Top Layer w0.254: U6.33 60.432,62.464 61.087,63.119
  Top Layer w0.3: 61.087,63.119 v2(62.484,63.119) ; v2(64.008,27.686) 64.604,28.282 R35.2
  Bottom Layer w0.3: v2(62.484,63.119) 64.008,61.595 v2(64.008,27.686)
NetR41_2: R41.2 RT1.2 TVS1.2 U5.7 | length 13
  Top Layer w0.5: U5.7 81.407,66.04 82.042,66.675 R41.2 82.257,67.818 TVS1.2 90.551,67.818 RT1.2
NetR42_1: R42.1 RT2.2 TVS2.1 U5.6 | length 19.1
  Top Layer w0.5: U5.6 79.414,64.731 81.153,64.731 R42.1 82.208,64.008 TVS2.1 88.138,64.008 89.535,65.405 93.345,65.405 RT2.2
NetR51_1: R51.1 U6.44 | length 2.8
  Top Layer w0.3: R51.1 52.082,67.845 U6.44
NetR52_1: R52.1 U6.6 | length 6
  Top Layer w0.3: R52.1 45.56,62.064 46.16,61.464 U6.6
NRST: C39.2 P8.3 R50.2 U6.7 | length 40.3
  Top Layer w0.3: R50.2 43.133,54.745 C39.2 46.236,54.745 46.99,55.499 v2(46.99,56.769) ; v2(44.831,61.087) 44.954,60.964 U6.7 ; P8.3 61.849,69.723 62.992,68.58 v2(62.992,66.675)
  Bottom Layer w0.3: v2(44.831,61.087) 44.831,58.928 v2(46.99,56.769) 47.625,56.769 57.658,66.802 62.865,66.802 v2(62.992,66.675)
RXD: R40.2 U5.1 U6.31 | length 24
  Top Layer w0.3: U6.31 68.449,61.464 69.088,62.103 69.088,65.786 70.612,67.31 U5.1
  Top Layer w0.5: R40.2 73.533,67.564 U5.1
SWCLK: P8.5 R44.2 U6.37 | length 13.1
  Top Layer w0.3: R44.2 56.603,71.667 P8.5 57.912,70.358 57.912,66.421 56.755,65.264 U6.37
SWDIO: P8.4 R47.2 U6.34 | length 25.4
  Top Layer w0.254: U6.34 59.535,62.964 60.579,64.008 60.579,70.231 P8.4
  Top Layer w0.3: v2(48.641,71.628) 48.68,71.667 R47.2
  Bottom Layer w0.3: v2(48.641,71.628) 50.038,73.025 57.785,73.025 P8.4
TXD: R38.2 U5.4 U6.30 | length 26
  Top Layer w0.254: v2(68.58,68.58) 69.723,69.723 R38.2
  Top Layer w0.3: U6.30 69.219,60.964 71.755,63.5
  Top Layer w0.5: v2(70.993,64.262) 71.755,63.5 U5.4
  Bottom Layer w0.254: v2(68.58,68.58) 68.58,66.675 v2(70.993,64.262)
VHUM: C33.1 C37.2 R45.1 U6.18 | length 60.8
  Top Layer w0.3: U6.18 52.582,52.828 54.483,50.927 61.595,50.927 63.119,52.451 63.119,54.991 64.77,56.642 71.12,56.642 74.287,53.475 C37.2
  Top Layer w0.5: C37.2 78.605,53.475 C33.1 87.757,53.086 98.243,42.6 98.56,42.6
VTEMP: C34.1 C38.2 R46.1 U6.19 | length 58.7
  Top Layer w0.3: U6.19 53.082,53.344 54.864,51.562 60.833,51.562 62.357,53.086 62.357,55.372 64.389,57.404 74.16,57.404 C38.2
  Top Layer w0.5: C38.2 78.351,57.142 C34.1 80.264,55.753 88.947,55.753 98.56,46.14
pads on no net: M1.3 U1.7 U6.2 U6.3 U6.4 U6.10 U6.11 U6.20 U6.25 U6.26 U6.32 U6.38 U6.39 U6.45 U6.46
copper on no net:
  other v1: 27.051,9.906 19.558,10.414 20.574,10.414 21.59,10.414 22.733,10.414 23.749,10.414

## Polygon pours and split planes (outlines as drawn)
GND on Top Layer "Bottom Layer-No Net" (solid, pour order 12): 40.894,72.263 59.944,72.263 60.198,72.009 61.976,70.231 61.976,59.944 61.976,55.118 60.325,53.467 60.071,53.721 43.942,53.721 42.926,53.721 41.021,55.626 40.767,55.88 40.767,72.136
GND on Top Layer "Bottom Layer-No Net" (solid, pour order 10): 41.148,73.152 41.402,73.406 59.436,73.406 59.436,57.74 58.396,56.7 58.073,57.023 41.529,57.023 41.529,73.152 41.275,73.406
GND on Top Layer "Bottom Layer-No Net" (solid, remove dead copper, pour order 4): 154.399,0.743 160.171,0.743 160.171,10.876 160.171,17.226 158.901,20.655 168.934,14.051 190.103,14.259 190.103,4.312 220.623,4.312 220.623,9.56 225.322,14.259 225.576,14.513 225.576,21.752 226.973,21.752 231.799,23.149 234.339,22.895 236.244,23.784 237.514,25.816 238.53,25.816 246.658,33.944 247.674,32.928 254.786,32.928 254.786,68.996 253.897,69.885 253.77,69.758 219.607,69.758 154.399,69.758 154.329,69.828
GND on Bottom Layer "Bottom Layer-No Net" (solid, remove dead copper, pour order 6): 148.994,147.467 249.534,147.467 249.546,147.455 249.494,147.402 249.494,110.212 240.815,110.212 239.926,109.323 232.941,102.338 223.924,102.338 223.289,102.338 219.225,98.274 218.844,97.893 218.844,81.366 185.333,81.366 185.062,81.637 185.189,81.764 185.189,94.083 154.328,94.083 148.994,99.417 148.955,99.456 148.955,147.459

## Keep-outs
Keep-Out Layer:
  lines w0.2: 83.5,0 100.5,0 100.5,75 ; 83.5,0.061 83.5,9 16.5,9 16.5,0 0,0 0,75 100.514,75 ; 80.772,26.289 81.534,25.527 81.661,25.4 89.789,33.528 101.473,33.528 101.727,33.401 101.727,34.417 88.9,34.417 80.772,26.289

## Other copper
Top Layer:
  rectangle net NetM1_2: 50.419,16.891 59.69,24.257
  rectangle net NetP2_1: 11.176,1.143 16.002,9.652
  rectangle net GND: 0.508,5.715 5.588,23.749
  rectangle net NetP1_1: 17.018,9.398 28.575,14.859
  pour cut-out: 45.187,20.066 49.022,20.066 49.022,16.891 48.895,16.764 45.085,16.764 45.085,19.964
  pour cut-out: 51.435,24.13 59.182,24.13 59.182,17.399 58.674,17.399 51.435,17.399
  pour cut-out: 4.572,29.591 4.572,24.003 7.62,24.003 5.842,25.781 5.842,29.845 4.826,29.845
  pour cut-out: 5.242,33.232 5.334,31.242 5.219,22.479 6.477,22.479 6.35,31.369 6.731,32.512 5.842,31.369 5.334,31.242
Bottom Layer:
  rectangle net 12V: 1.905,0.762 9.779,4.191
  rectangle net NetM1_2: 50.927,16.637 59.309,23.876
  rectangle net GND: 0.508,5.588 5.715,21.082
  rectangle net NetP2_1: 10.922,1.143 15.621,20.447
  rectangle net NetP1_1: 17.272,9.398 34.671,15.494

## Silkscreen, mask and mechanical layers (free items; w line width, h text height)
Top Overlay:
  circle w2: c13.97,46.99 r3
  circle w2: c13.97,28.956 r3
  circle w2: c84.963,46.736 r3
  circle w2: c76.962,23.749 r3
  circle w0.2: c66.57,34.925 r1.154
  circle w0.2: c66.57,41 r1.047
  circle w0.2: c31.52,34.96 r0.991
  circle w0.2: c31.52,41 r0.781
  lines w0.3: 19,46.786 19,47.6 19,48.564 ; 65,34.96 68.199,34.96 ; 96.266,21 100.5,21 ; 98.56,53.22 100.5,53.22 100.5,75
Top Solder:
  rectangle: 0.508,5.842 5.715,21.209
  rectangle: 12.319,2.286 15.113,8.128
  rectangle: 2.159,0.889 9.779,4.191
  rectangle: 17.526,9.652 34.671,14.351
  lines w2.1: 8.763,13.843 11.811,16.891 23.876,16.891 25.273,18.288 25.654,18.288 25.781,18.415 47.117,18.415 ; 38.989,15.367 39.116,15.494 39.116,18.542
  lines w2.3: 8.255,13.843 8.763,13.843
  lines w2.6: 8.128,2.667 8.255,2.794 8.255,13.843
Bottom Solder:
  rectangle: 0.508,5.842 5.715,21.209
  rectangle: 17.653,9.652 31.369,14.097
  rectangle: 28.702,9.779 34.671,15.748
  rectangle: 12.446,2.413 14.986,8.128
  rectangle: 12.065,7.493 14.605,20.447
  rectangle: 2.032,0.762 9.779,4.191
  lines w2: 75.508,11.303 75.508,13.278 94.21,31.98 98.56,31.98 ; 82.508,11.303 84.756,11.303 87.884,8.175 86.487,9.572 86.487,15.875 95.504,24.892 98.044,24.892 98.56,25.408 98.56,28.44 ; 94.559,12.898 94.249,13.208 94.249,13.35 98.552,17.653 98.552,21.209
  lines w3: 87.884,3.175 87.884,8.175 ; 94.559,12.898 93.599,12.898 94.869,11.628 94.869,8.429 94.869,3.429
Mechanical 1:
  circle w0.2: c14,29 r2.2
  circle w0.2: c86,46.7 r2.2
  circle w0.2: c77,23.7 r2.2
  circle w0.2: c14,47 r2.2

## Text inside footprints (layer, text, board x,y; h text height)
J1: Bottom Overlay "1" at 59.055,35.179 h0.8
Q1: Top Overlay "1" at 37.617,10.135 h0.8 r90; Top Overlay "3" at 37.668,16.688 h0.8 r90; Top Overlay "2" at 38.684,13.081 h0.8 r90
Q2: Top Overlay "1" at 48.997,24.663 h0.8 r270; Top Overlay "3" at 48.946,18.11 h0.8 r270; Top Overlay "2" at 47.93,21.717 h0.8 r270
U4: Top Overlay "1" at 9.931,34.9 h0.8 r90; Top Overlay "3" at 9.982,41.453 h0.8 r90; Top Overlay "2" at 10.998,37.846 h0.8 r90